# Altium PCB Dual Power.PcbDoc
Units mil, origin at the board's own origin, x right, y up, seen from the top; angles counter-clockwise.
Board outline 6000 x 4000 mil, 2 copper layers (Top Layer, Bottom Layer); 36 components, 16 nets, 90 pads, 15 vias.
Unrouted connection lines stored in the file: 1.
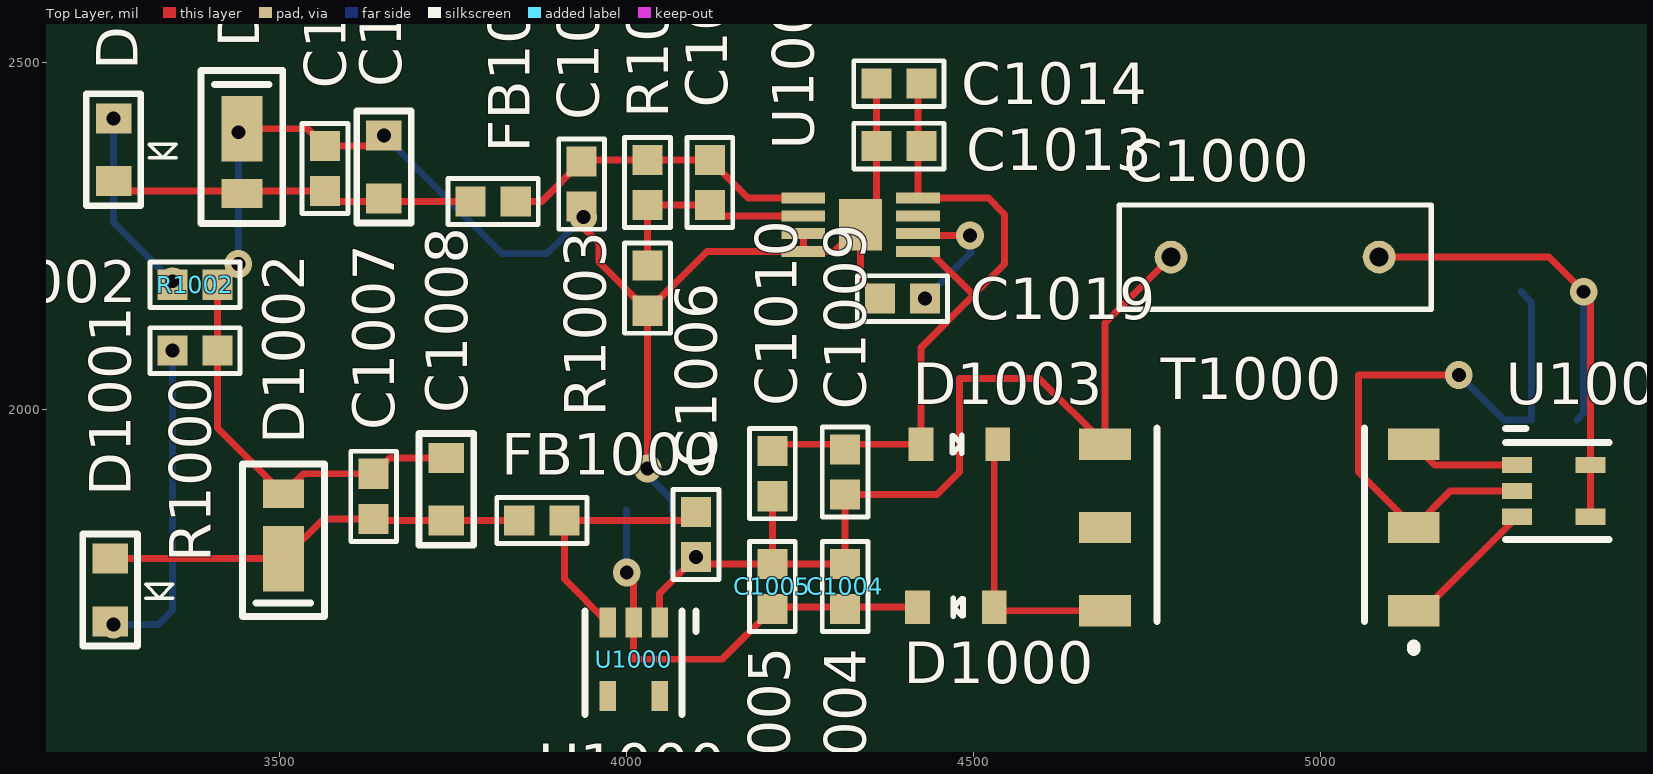
[diagram p0: Top Layer view]
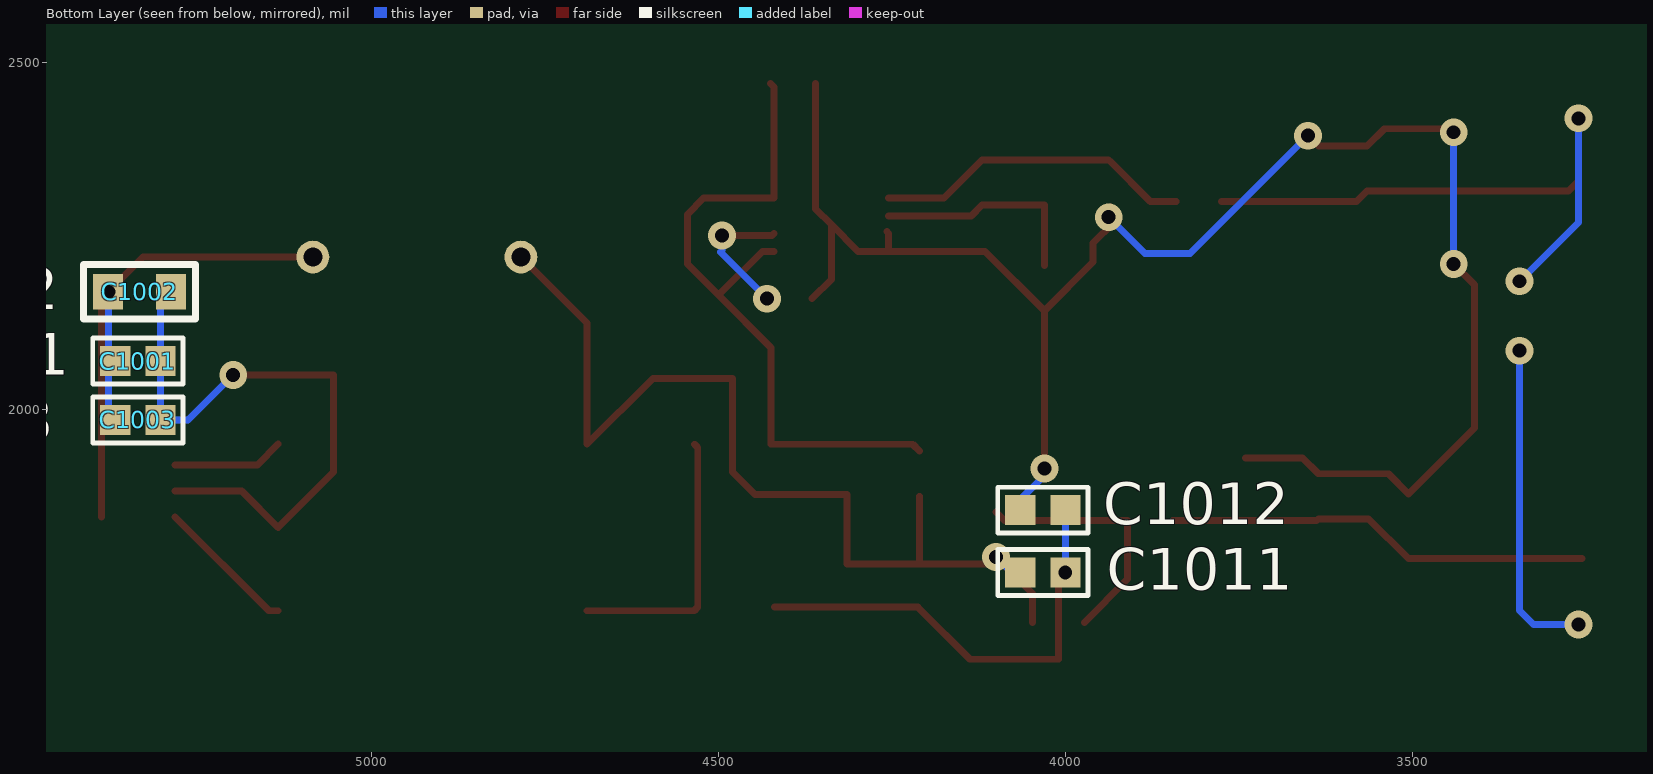
[diagram p1: Bottom Layer view, seen from below]

## Layer stack, top to bottom
Top Solder: solder mask 0.4, Solder Resist, Dk 3.5
Top Layer: signal copper 1.4
Dielectric 1: dielectric 12.6, FR-4, Dk 4.8
Bottom Layer: signal copper 1.4
Bottom Solder: solder mask 0.4, Solder Resist, Dk 3.5

## Board outline
1000,1000 7000,1000 7000,5000 1000,5000

## Design rules (kind name [scope] priority, off if disabled: settings)
Clearance [All] p1: gap=10 ignorepadtopadclearanceinfootprint=TRUE except(0: Arc-Hole Track-Hole SMDPad-Hole THPad-Hole Via-Hole Fill-Hole Poly-Hole Region-Hole Text-Hole)
PolygonConnect [All] p1: connectstyle=Relief reliefconductorwidth=10 reliefentries=4 polygonreliefangle="90 Angle" airgapwidth=10
RoutingVias [All] p1: holewidth=20 width=40 viastyle="Through Hole" minholewidth=20 minwidth=40 maxholewidth=28 maxwidth=50
SolderMaskExpansion [All] p1: expansion=4
Width [All] p1: maxlimit=10 minlimit=10 preferedwidth=10
30 further rules are at their usual default settings.

## Components (designator, comment, footprint, x,y, rotation, side; value= is the part's Value field where it differs from the comment)
C1000 "Cap TH" RAD-0.3 4935,2220 r180 top value=1000pF
C1001 "Cap 0603_new" "0603 (1608 Metric)" 5337.52,2070 r180 bottom value=10uF
C1002 "Cap 0805" "0805 (2012 metric)" 5335,2170 r180 bottom value=22uF
C1003 "Cap 0603_new" "0603 (1608 Metric)" 5337.52,1985 r180 bottom value=0.1uF
C1004 "Cap 0603_new" "0603 (1608 Metric)" 4315,1745 r270 top value=10uF
C1005 "Cap 0603_new" "0603 (1608 Metric)" 4210,1745 r270 top value=0.1uF
C1006 "Cap 0603_new" "0603 (1608 Metric)" 4100,1820 r90 top value=10uF
C1007 "Cap 0603_new" "0603 (1608 Metric)" 3635,1875 r270 top value=0.1uF
C1008 "Cap 0805" "0805 (2012 metric)" 3740,1885 r270 top value=4.7uF
C1009 "Cap 0603_new" "0603 (1608 Metric)" 4315,1910 r270 top value=10uF
C1010 "Cap 0603_new" "0603 (1608 Metric)" 4210,1907.52 r270 top value=0.1uF
C1011 "Cap 0603_new" "0603 (1608 Metric)" 4032.48,1765 r180 bottom value=10uF
C1012 "Cap 0603_new" "0603 (1608 Metric)" 4032.48,1855 r180 bottom value=0.1uF
C1013 "Cap 0603_new" "0603 (1608 Metric)" 4392.52,2380 r0 top value=10uF
C1014 "Cap 0603_new" "0603 (1608 Metric)" 4392.48,2470 r0 top value=0.1uF
C1015 "Cap 0603_new" "0603 (1608 Metric)" 4120,2327.52 r270 top value=0.01uF
C1016 "Cap 0603_new" "0603 (1608 Metric)" 3565,2347.52 r270 top value=0.1uF
C1017 "Cap 0805" "0805 (2012 metric)" 3650,2349.72 r270 top value=4.7uF
C1018 "Cap 0603_new" "0603 (1608 Metric)" 3935,2325 r90 top value=10uF
C1019 "Cap 0603_new" "0603 (1608 Metric)" 4397.52,2160 r0 top value=0.01uF
D1000 "Diode MBR0520" SOD-123 4530,1715 r180 top
D1001 "LED" "0805 (2012 Metric) Diode" 3255,1740 r270 top
D1002 "Diode Zener POWERDI123" POWERDI 3505,1878.5 r270 top
D1003 "Diode MBR0520" SOD-123 4424.17,1950 r0 top
D1004 "LED" "0805 (2012 Metric) Diode" 3260,2374.72 r270 top
D1005 "Diode Zener POWERDI123" POWERDI 3445,2311.5 r90 top
FB1000 "Ferrite bead" "0603 (1608 Metric)" 3877.52,1840 r180 top value=1K
FB1001 "Ferrite bead" "0603 (1608 Metric)" 3807.52,2300 r180 top value=1K
R1000 "Resistor 0603" "0603 (1608 Metric)" 3377.52,2085 r180 top value=3.9k
R1001 "Resistor 0603" "0603 (1608 Metric)" 4030,2327.48 r90 top value=3.16k
R1002 "Resistor 0603" "0603 (1608 Metric)" 3377.48,2180 r180 top value=3.9k
R1003 "Resistor 0603" "0603 (1608 Metric)" 4030,2175 r90 top value=11.5k
T1000 "750313769" "Xmr SN6501" 5135,1709.92 r180 top
U1000 "TLV70450DBV" SOT23-5 4010,1640 r180 top
U1001 "SN6501" SOT23-5 5336.85,1882.6 r270 top
U1003 "TPS7A30" 8-TSSOP 4337.32,2266.61 r270 top

## Footprints (in the part's own frame and the unit in brackets; to place one, negate y for a bottom-side part, rotate by r counter-clockwise, add the part's x,y. Pads: shape width x height; smd on the part's side, far side on the other; paste and mask are expansions set on the pad)
8-TSSOP [mm]
  rect 0.4x1.6 smd mask+0.07: 1(-0.975,-2.1) 2(-0.325,-2.1) 3(0.325,-2.1) 4(0.975,-2.1) 5(0.975,2.1) 6(0.325,2.1) 7(-0.325,2.1) 8(-0.975,2.1)
  rect 1.89x1.57 smd mask+0.07: 9(0,0)
  round 0.4 on Top Overlay: ""(-1.8,-2.8)
"0603 (1608 Metric)" [mm]
  rect 1.1x1.1 smd: 1(-0.825,0) 2(0.825,0)
  silkscreen extent -1.65,-0.84 1.65,0.84, body extent -1.02,-0.51 1.02,0.51, height 0.5
"0805 (2012 metric)" [mm]
  rect 1.1x1.3 smd: 1(-1.15,0) 2(1.15,0)
  silkscreen extent -2.05,-1 2.05,1
"0805 (2012 Metric) Diode" [mm]
  rect 1.1x1.3 smd: A(-1.15,0) K(1.15,0)
  silkscreen extent -2.05,-1 2.05,2.3
POWERDI [mm]
  rect 2.4x1.5 smd mask+0.07: 1(2.375,0)
  rect 1.05x1.5 smd mask+0.07: 2(0,0)
  silkscreen extent -1.1,-1.5 4.5,1.5
RAD-0.3 [mm] "Radial Cap, Thru-Hole; 2 Leads; 0.3 in Pin Spacing"
  round 1.2 hole 0.7: 1(-3.81,0) 2(3.81,0)
  silkscreen extent -5.71,-1.91 5.71,1.91
SOD-123 [mm]
  rect 0.91x1.22 smd: 1(0,0) 2(2.815,0)
  silkscreen extent 1.14,-0.33 1.5,0.33
SOT23-5 [mm] "SOT23-5 for REF2030, TI"
  rect 0.6x1.1 smd: 1(-0.95,-1.35) 2(0,-1.35) 3(0.95,-1.35) 4(0.95,1.35) 5(-0.95,1.35)
  silkscreen extent -2.29,-1.77 1.78,2.03
"Xmr SN6501" [mm] "Xmr SN6501"
  rect 1.9x1.14 smd: 1(0,0) 2(0,-3.05) 3(0,-6.1) 4(11.31,-6.1) 5(11.31,-3.05) 6(11.31,0)
  silkscreen extent 0,-6.7 9.4,1.4

## Part data
C1000: library part Cap, "CAP CER 1000PF 1KV Y5P RADIAL", LatestRevisionDate=17-Jul-2002, LatestRevisionNote="Re-released for DXP Platform.", PackageDescription="Radial Cap, Thru-Hole; 2 Leads; 0.3 in Pin Spacing", PackageReference=RAD-0.3, part=1251PH-ND, Published=8-Jun-2000, Publisher="Altium Limited"
C1001 C1004 C1006 C1009 C1011 C1013 C1018: "CAP CER 10UF 35V X5R 0805", part=490-10515-1-ND
C1002: "CAP CER 22UF 35V X5R 0805", part=445-14428-1-ND
C1003 C1005 C1007 C1010 C1012 C1014 C1016: "CAP CER 0.1UF 50V Y5V 0603", part=311-1343-6-ND
C1008 C1017: "CAP CER 4.7UF 50V X5R 0805", part=445-5980-1-ND
C1015 C1019: "CAP CER 10000PF 100V X7R 0603", part=478-7418-1-ND
D1000 D1003: "DIODE SCHOTTKY 20V 500MA SOD123", part=MBR0520LT1GOSCT-ND
D1001 D1004: "LED 0805"
D1002 D1005: "DIODE ZENER POWERDI123"
FB1000 FB1001: "FERRITE BEAD 1 KOHM 0603 1LN", part=445-8672-1-ND
R1000 R1002: "RES SMD 3.9K OHM 5% 1/10W 0603", part=541-3.9KGCT-ND
R1001: "RES SMD 3.16K OHM 1% 1/10W 0603", part=311-3.16KHRCT-ND
R1003: "RES SMD 11.5K OHM 1% 1/10W 0603", part=541-11.5KHCT-ND
T1000: "TRANSFORMER SMD TR1.7 SN6501", part=1297-1107-1-ND
U1000: "IC REG LDO 5V 0.15A SOT23-5", part=296-39287-1-ND
U1001: "IC REG CONV PWR SUPPLIES SOT23-5"
U1003: "IC REG LDO NEG ADJ 0.2A 8MSOP", part=296-27750-1-ND

## Via types
v1: diameter 40, hole 20, Top Layer to Bottom Layer, 15 vias

## Nets (pads, with @x,y where several pads share a name; then routed paths per layer and width w, separated by ;. In a path a pad name is that pad's centre, name@x,y a point inside that pad or via, vN(x,y) a via of type N, cw(c..) or ccw(c..) an arc to the next point about the centre after c; other vN are vias at no path point)
5V_LV: C1001.2 C1002.2 C1003.2 T1000.2 U1001.2 | length 891.9
  Top Layer w10: v1(5200,2050) 5055,2050 5055,1910 T1000.2 5187.6,1882.6 U1001.2
  Bottom Layer w10: v1(5200,2050) 5265,1985 C1003.2 C1001.2 5305.04,2154.68 C1002.2
+5V_USH1: C1007.2 C1008.2 D1001.A D1002.1 FB1000.2 | length 615
  Top Layer w10: D1001.A 3255.28,1785 D1002.1 3562.52,1842.52 C1007.2 3637.52,1840 FB1000.2
+6V_USH1: C1004.2 C1005.2 C1011.2 C1012.2 D1000.2 U1000.2 | length 659.4
  Top Layer w10: v1(4000,1765) 4010,1755 U1000.2 4010,1640 4137.48,1640 C1005.2 4212.48,1715 D1000.2
  Bottom Layer w10: v1(4000,1765) C1012.2
-5V_USH1: C1016.2 C1017.2 D1004.K D1005.2 FB1001.2 | length 527.2
  Top Layer w10: D1004.K 3274.41,2315.04 C1016.2 3580.04,2300 FB1001.2
-6V_USH1: C1009.1 C1010.1 C1013.2 C1014.2 D1003.1 U1003.5 U1003.8 | length 1007.9
  Top Layer w10: C1010.1 4220,1950 D1003.1 4424.17,2089.17 4500,2165 ; U1003.5 4436.77,2228.23 4500,2165 ; C1014.2 4420,2465.04 U1003.8 4521.57,2305 4545,2281.57 4545,2210 4500,2165
GND_LV: C1000.1 C1001.1 C1002.1 C1003.1 U1001.4 U1001.5 | length 833.8
  Top Layer w10: C1000.1 5330,2220 v1(5380,2170) 5390,2160 U1001.5 U1001.4
  Bottom Layer w10: C1003.1 5380,1995 v1(5380,2170)
GND_USH1: C1000.2 C1004.1 C1005.1 C1006.1 C1007.1 C1008.1 C1009.2 C1010.2 C1011.1 C1012.1 C1013.1 C1014.1 C1016.1 C1017.1 C1018.1 C1019.1 D1002.2 D1005.1 R1000.1 R1002.1 R1003.1 T1000.4 U1000.1 U1003.3 U1003.4 U1003.9 | length 4118
  Top Layer w10: v1(3440,2210.04) R1002.1 R1000.1 R1000.1 3410,1973.5 D1002.2 3533.98,1907.48 C1007.1 3657.8,1930.28 C1008.1 ; v1(3440,2400) D1005.1 3540,2405 C1016.1 3635,2380 v1(3650,2395) C1017.1@3660,2385 ; C1018.1 3937.52,2290 v1(3937.52,2277.52) 3930,2270 3960,2240 3960,2212.52 R1003.1 ; v1(4030,1915) R1003.1 ; U1000.1 4047.4,1734.92 v1(4100,1787.52) 4110.04,1777.48 C1005.1 ; C1010.2 C1005.1 ; U1003.3@4257.36,2256.54 U1003.3 U1003.4 ; C1014.1 4360,2289.29 U1003.9 ; C1019.1 4337.32,2187.72 U1003.9 ; C1000.2 4689.72,2124.72 T1000.4 4594.8,2045 4480,2045 4480,1910 4447.52,1877.52 C1009.2 C1004.1 C1005.1 ; R1003.1 4115.71,2228.23 U1003.4 ; U1003.4 4298.94,2228.23 U1003.9
  Bottom Layer w10: v1(3440,2210.04) v1(3440,2400) ; v1(3650,2395) 3820,2225 3885,2225 v1(3937.52,2277.52) ; v1(4030,1915) 4030,1905 4064.96,1870.04 C1012.1 ; C1011.1 4077.48,1765 v1(4100,1787.52)
NetC1006_2: C1006.2 FB1000.1 U1000.3 | length 367.9
  Top Layer w10: U1000.3 3910,1755.75 FB1000.1 4087.52,1840 C1006.2
NetC1015_1: C1015.1 C1018.2 FB1001.1 R1001.2 U1003.1 | length 462.3
  Top Layer w10: FB1001.1 3877.52,2300 C1018.2 3937.48,2359.96 R1001.2 R1001.2 C1015.1 4175,2305 U1003.1
NetC1015_2: C1015.2 R1001.1 R1003.2 U1003.2 | length 318.7
  Top Layer w10: R1003.2 R1001.1 R1001.1 C1015.2 4135.63,2279.41 U1003.2
NetC1019_2: C1019.2 U1003.6 | length 196
  Top Layer w10: U1003.6 4422.72,2251.1 v1(4495,2251.1)
  Bottom Layer w10: v1(4430,2160) 4497.2,2227.2 4495,2229.41 v1(4495,2251.1)
NetD1000_1: D1000.1 D1003.2 T1000.6 | length 398.9
  Top Layer w10: D1003.2 4530,1945 D1000.1 4535.08,1709.92 T1000.6
NetD1001_K: D1001.K R1000.2 | length 475.3
  Top Layer w10: D1001.K D1001.K@3259.72,1690
  Bottom Layer w10: v1@3259.72,1690 v1(3260,1690) 3325.08,1690 3345.04,1709.96 v1(3345.04,2085)
NetD1004_A: D1004.A R1002.2 | length 289.4
  Top Layer w10: v1(3260,2420) D1004.A@3270,2410 ; R1002.2 v1(3345,2185)
  Bottom Layer w10: v1(3260,2420) 3260,2270 v1(3345,2185)
NetT1000_1: T1000.1 U1001.3 | length 204.7
  Top Layer w10: T1000.1 5148.43,1709.92 U1001.3
NetT1000_3: T1000.3 U1001.1 | length 161.2
  Top Layer w10: T1000.3 5165.08,1920 U1001.1
pads on no net: T1000.5 U1000.4 U1000.5 U1003. U1003.7